# Altium PCB Light Panel - Copy.PcbDoc (part 1 of 2)
Units mm, origin at the board's own origin, x right, y up, seen from the top; angles counter-clockwise.
Board outline 300 x 185 mm, 2 copper layers (Top Layer, Bottom Layer), stack 1.671 mm thick; 278 components, 216 nets, 568 pads, 0 vias.
Unrouted connection lines stored in the file: 23.
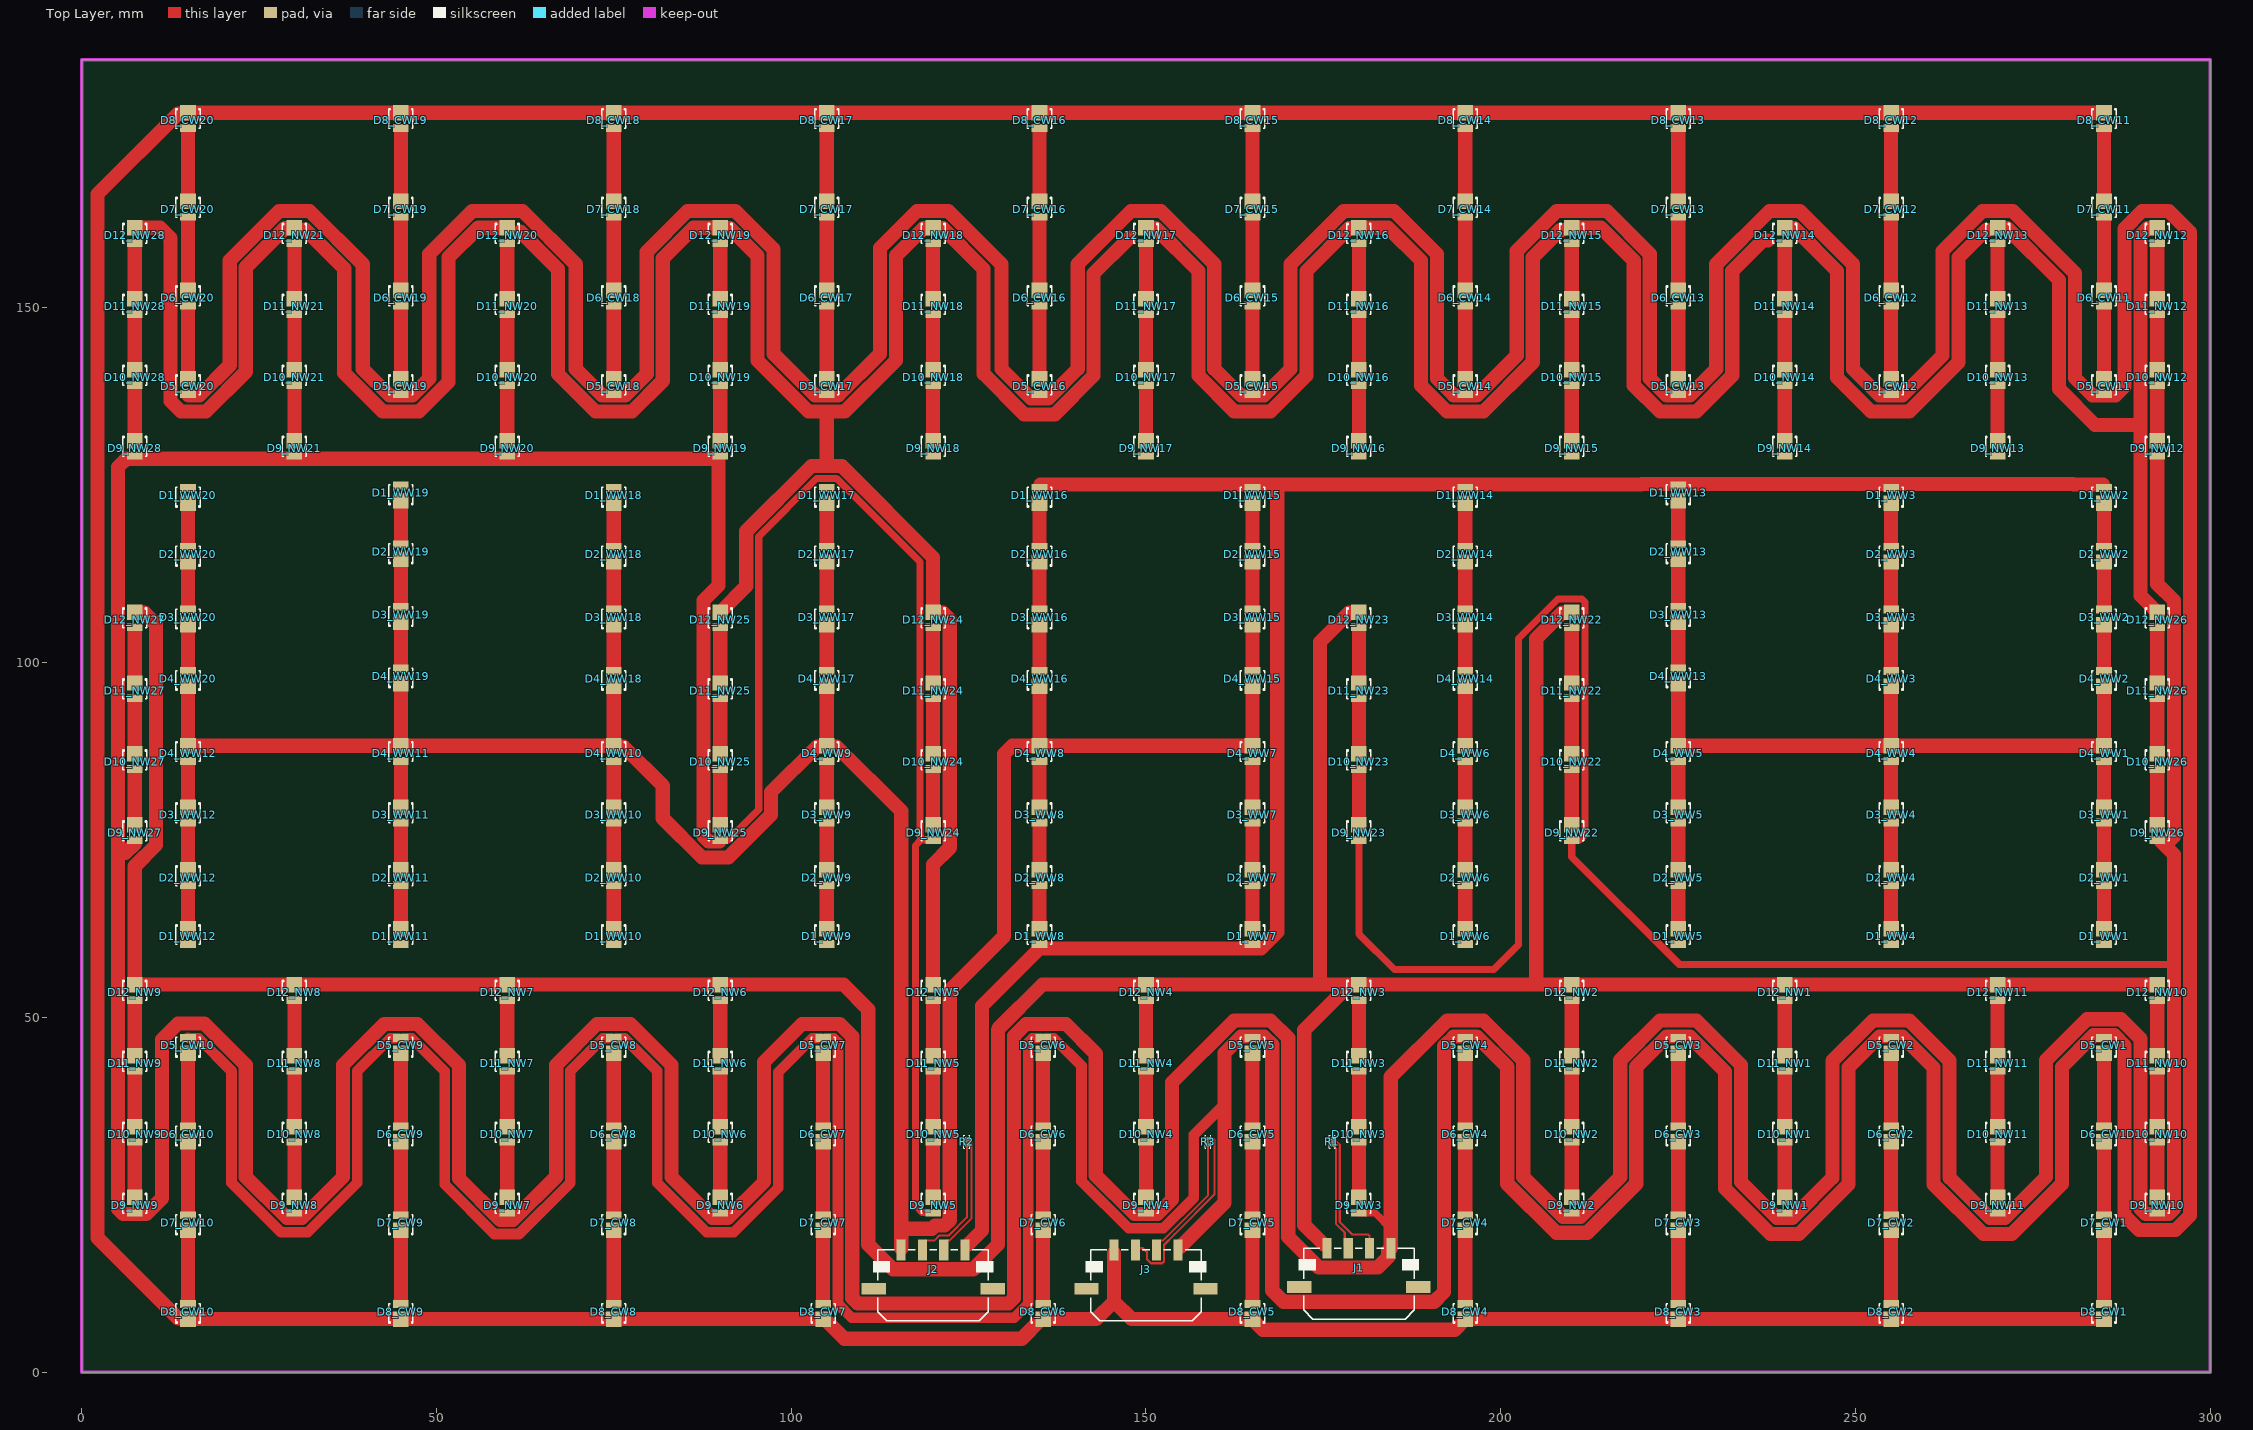
[diagram p0: Top Layer view]
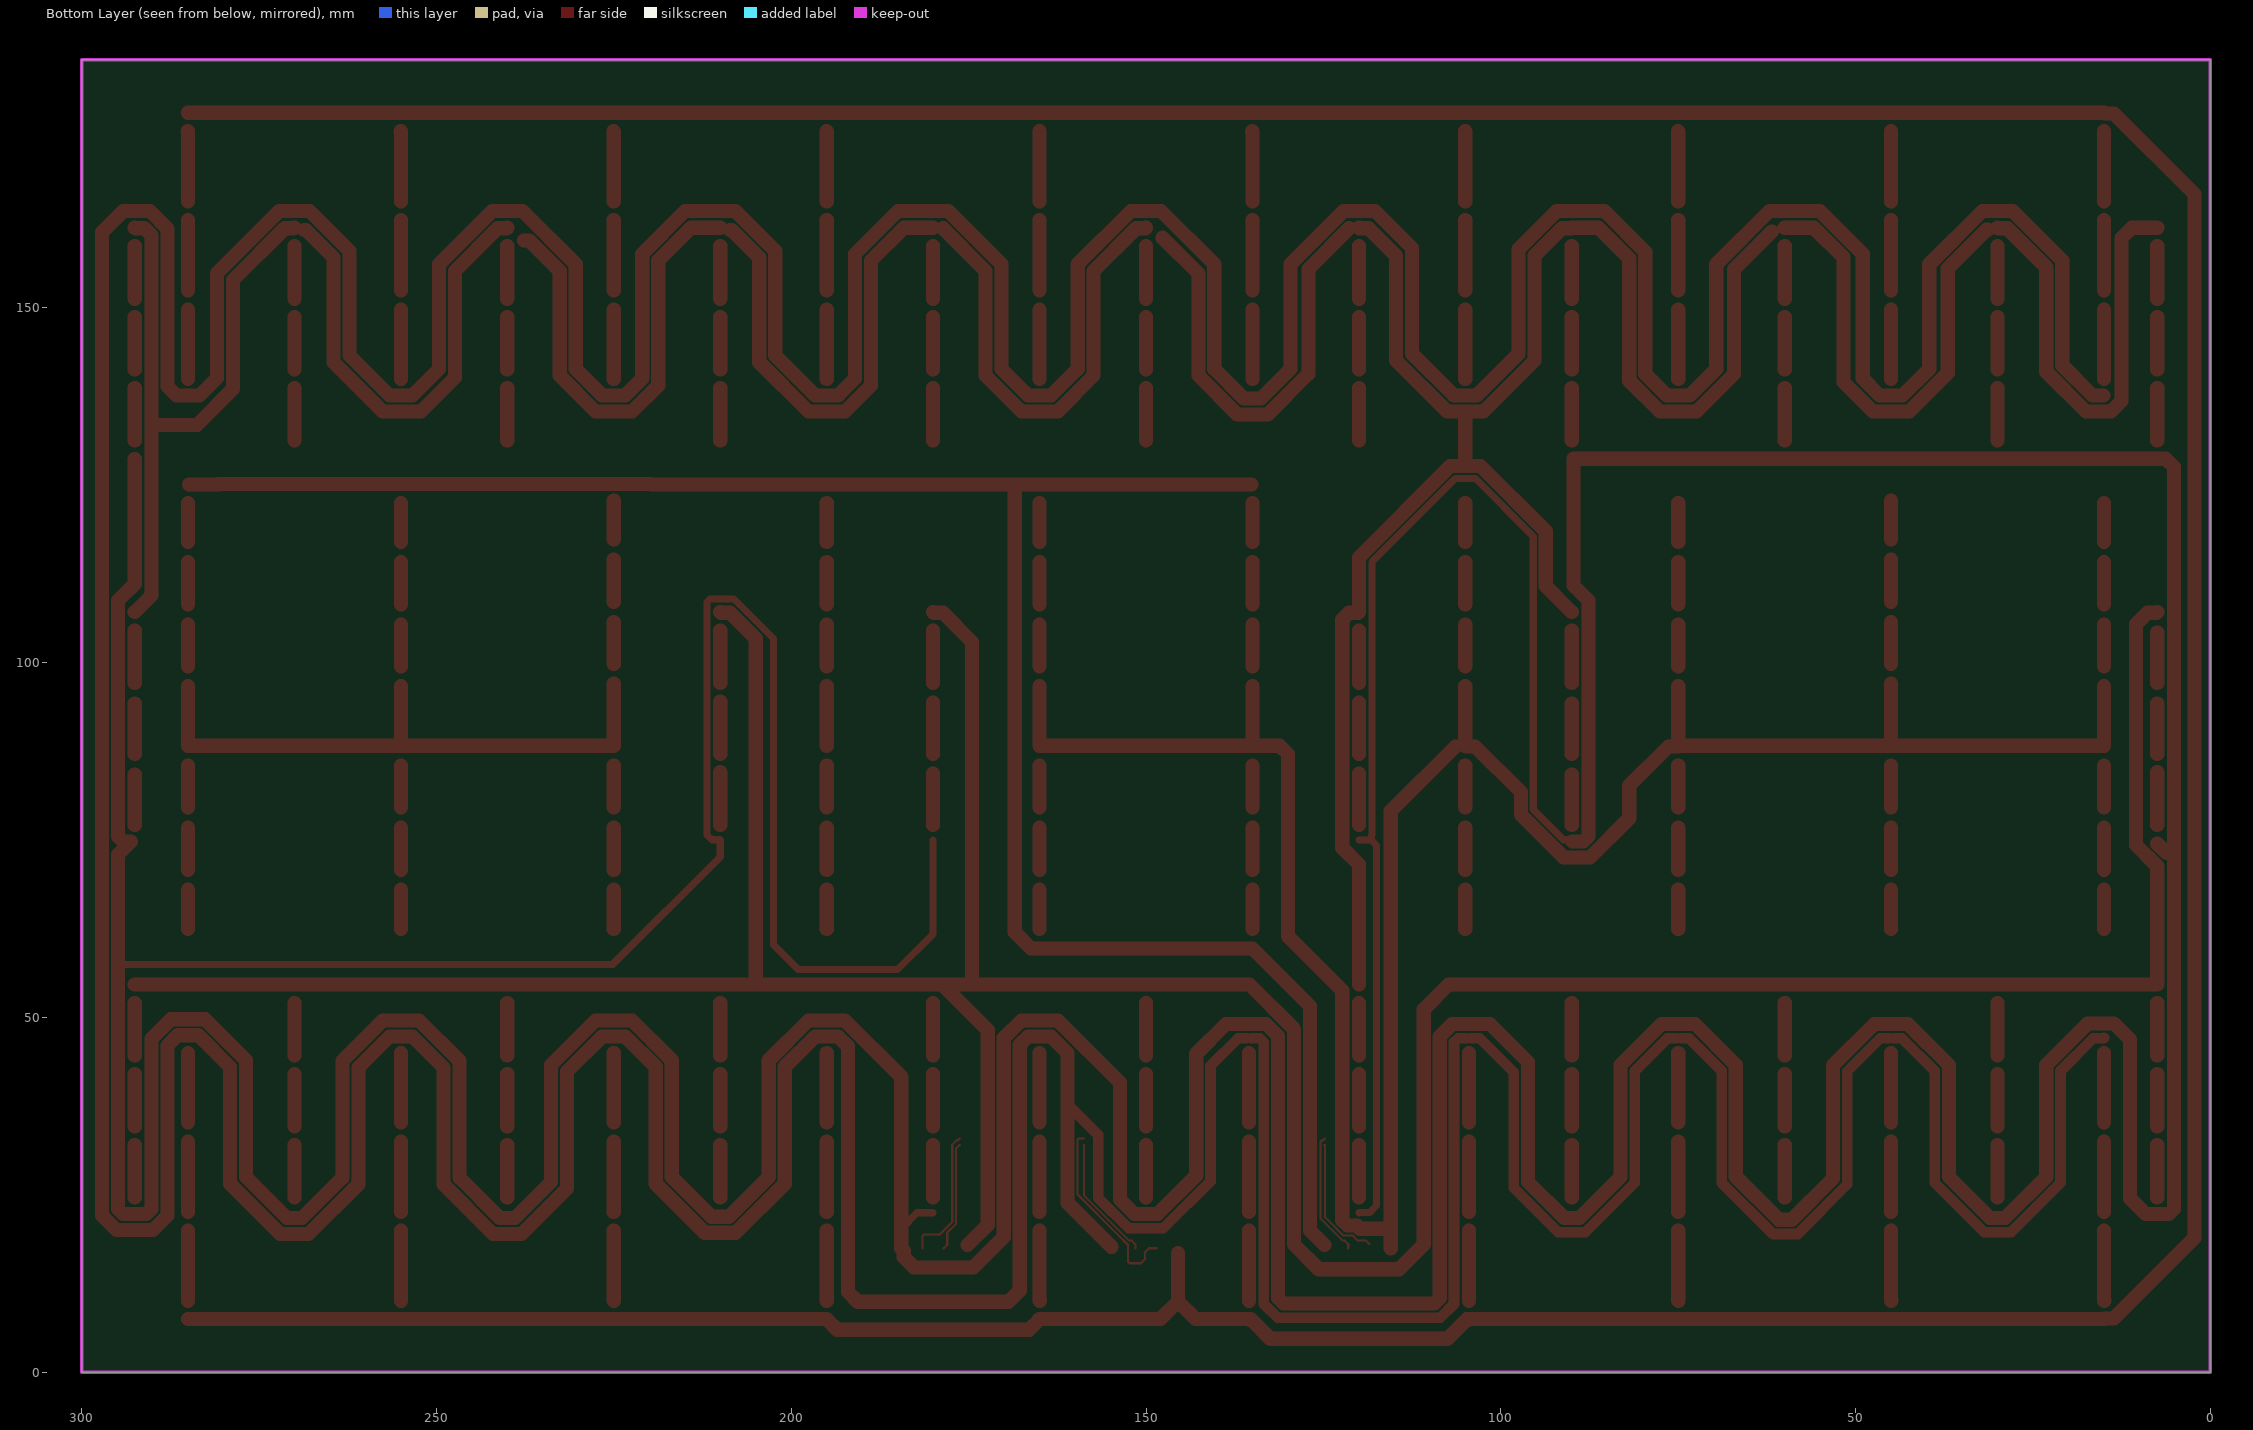
[diagram p1: Bottom Layer view, seen from below]
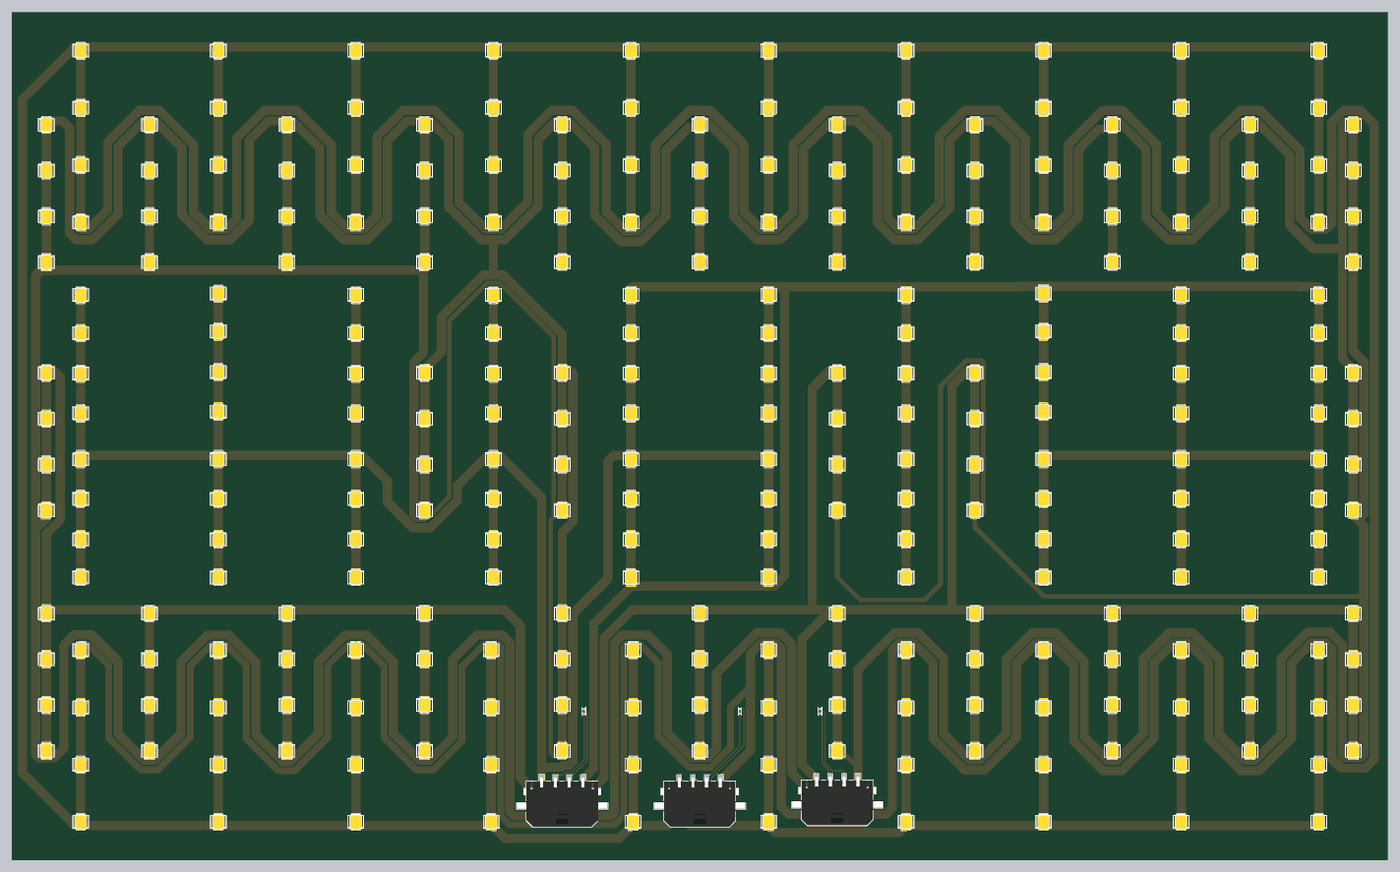
[diagram p3: 3D render of the assembled board from above, using the file's embedded part models]

## Layer stack, top to bottom
Top Solder: solder mask 0.0102, Solder Resist, Dk 3.5
Top Layer: signal copper 0.0356
Dielectric 1: dielectric 0.2, FR-4, Dk 4.8
Aluminium: core 1.4, Al, Dk 4.5
Bottom Layer: signal copper 0.0356
Bottom Solder: solder mask 0.0102, Solder Resist, Dk 3.5

## Board outline
0,0 300,0 300,185 0,185

## Design rules (kind name [scope] priority, off if disabled: settings)
Clearance [All] p1: gap=0.254 ignorepadtopadclearanceinfootprint=FALSE except(0: Arc-Hole Track-Hole SMDPad-Hole THPad-Hole Via-Hole Fill-Hole Poly-Hole Region-Hole Text-Hole)
PolygonConnect [All] p1: connectstyle=Direct reliefconductorwidth=0.254 reliefentries=4 polygonreliefangle="90 Angle" airgapwidth=0.254
RoomDefinition CW7 [InComponentClass('CW7')] p1: confinementstyle=ConfineIn formatcopy=TRUE lockcomponents=FALSE outline 102,50 102,5.805 107,5.805 107,50
RoomDefinition "Studio Light Panel" [InComponentClass('Studio Light Panel')] p2: confinementstyle=ConfineIn formatcopy=TRUE lockcomponents=FALSE outline 107.5,0 192.5,0 192.5,37.25 107.5,37.25
RoomDefinition NW1 [InComponentClass('NW1')] p3: confinementstyle=ConfineIn formatcopy=TRUE lockcomponents=FALSE outline 242.5,20.84 242.5,57.5 237.5,57.5 237.5,20.84
RoomDefinition NW2 [InComponentClass('NW2')] p4: confinementstyle=ConfineIn formatcopy=TRUE lockcomponents=FALSE outline 212.5,20.84 212.5,57.5 207.5,57.5 207.5,20.84
RoomDefinition NW3 [InComponentClass('NW3')] p5: confinementstyle=ConfineIn formatcopy=TRUE lockcomponents=FALSE outline 182.5,20.84 182.5,57.5 177.5,57.5 177.5,20.84
RoomDefinition NW4 [InComponentClass('NW4')] p6: confinementstyle=ConfineIn formatcopy=TRUE lockcomponents=FALSE outline 152.5,20.84 152.5,57.5 147.5,57.5 147.5,20.84
RoomDefinition NW5 [InComponentClass('NW5')] p7: confinementstyle=ConfineIn formatcopy=TRUE lockcomponents=FALSE outline 122.5,20.84 122.5,57.5 117.5,57.5 117.5,20.84
RoomDefinition NW6 [InComponentClass('NW6')] p8: confinementstyle=ConfineIn formatcopy=TRUE lockcomponents=FALSE outline 92.5,20.84 92.5,57.5 87.5,57.5 87.5,20.84
RoomDefinition NW7 [InComponentClass('NW7')] p9: confinementstyle=ConfineIn formatcopy=TRUE lockcomponents=FALSE outline 62.5,20.84 62.5,57.5 57.5,57.5 57.5,20.84
RoomDefinition NW8 [InComponentClass('NW8')] p10: confinementstyle=ConfineIn formatcopy=TRUE lockcomponents=FALSE outline 32.5,20.84 32.5,57.5 27.5,57.5 27.5,20.84
RoomDefinition NW9 [InComponentClass('NW9')] p11: confinementstyle=ConfineIn formatcopy=TRUE lockcomponents=FALSE outline 10,20.84 10,57.5 5,57.5 5,20.84
RoomDefinition NW10 [InComponentClass('NW10')] p12: confinementstyle=ConfineIn formatcopy=TRUE lockcomponents=FALSE outline 295,20.84 295,57.5 290,57.5 290,20.84
RoomDefinition NW12 [InComponentClass('NW12')] p13: confinementstyle=ConfineIn formatcopy=TRUE lockcomponents=FALSE outline 295,127.5 295,164.16 290,164.16 290,127.5
RoomDefinition NW13 [InComponentClass('NW13')] p14: confinementstyle=ConfineIn formatcopy=TRUE lockcomponents=FALSE outline 272.5,127.5 272.5,164.16 267.5,164.16 267.5,127.5
RoomDefinition NW14 [InComponentClass('NW14')] p15: confinementstyle=ConfineIn formatcopy=TRUE lockcomponents=FALSE outline 242.5,127.5 242.5,164.16 237.5,164.16 237.5,127.5
RoomDefinition NW15 [InComponentClass('NW15')] p16: confinementstyle=ConfineIn formatcopy=TRUE lockcomponents=FALSE outline 212.5,127.5 212.5,164.16 207.5,164.16 207.5,127.5
RoomDefinition NW16 [InComponentClass('NW16')] p17: confinementstyle=ConfineIn formatcopy=TRUE lockcomponents=FALSE outline 182.5,127.5 182.5,164.16 177.5,164.16 177.5,127.5
RoomDefinition NW17 [InComponentClass('NW17')] p18: confinementstyle=ConfineIn formatcopy=TRUE lockcomponents=FALSE outline 152.5,127.5 152.5,164.16 147.5,164.16 147.5,127.5
RoomDefinition NW18 [InComponentClass('NW18')] p19: confinementstyle=ConfineIn formatcopy=TRUE lockcomponents=FALSE outline 122.5,127.5 122.5,164.16 117.5,164.16 117.5,127.5
RoomDefinition NW19 [InComponentClass('NW19')] p20: confinementstyle=ConfineIn formatcopy=TRUE lockcomponents=FALSE outline 92.5,127.5 92.5,164.16 87.5,164.16 87.5,127.5
RoomDefinition NW20 [InComponentClass('NW20')] p21: confinementstyle=ConfineIn formatcopy=TRUE lockcomponents=FALSE outline 62.5,127.5 62.5,164.16 57.5,164.16 57.5,127.5
RoomDefinition NW21 [InComponentClass('NW21')] p22: confinementstyle=ConfineIn formatcopy=TRUE lockcomponents=FALSE outline 32.5,127.5 32.5,164.16 27.5,164.16 27.5,127.5
RoomDefinition NW22 [InComponentClass('NW22')] p23: confinementstyle=ConfineIn formatcopy=TRUE lockcomponents=FALSE outline 212.5,73.34 212.5,110 207.5,110 207.5,73.34
RoomDefinition NW23 [InComponentClass('NW23')] p24: confinementstyle=ConfineIn formatcopy=TRUE lockcomponents=FALSE outline 182.5,73.34 182.5,110 177.5,110 177.5,73.34
RoomDefinition NW24 [InComponentClass('NW24')] p25: confinementstyle=ConfineIn formatcopy=TRUE lockcomponents=FALSE outline 122.5,73.34 122.5,110 117.5,110 117.5,73.34
RoomDefinition NW25 [InComponentClass('NW25')] p26: confinementstyle=ConfineIn formatcopy=TRUE lockcomponents=FALSE outline 92.5,73.34 92.5,110 87.5,110 87.5,73.34
RoomDefinition NW26 [InComponentClass('NW26')] p27: confinementstyle=ConfineIn formatcopy=TRUE lockcomponents=FALSE outline 295,73.34 295,110 290,110 290,73.34
RoomDefinition NW27 [InComponentClass('NW27')] p28: confinementstyle=ConfineIn formatcopy=TRUE lockcomponents=FALSE outline 10,73.34 10,110 5,110 5,73.34
RoomDefinition NW28 [InComponentClass('NW28')] p29: confinementstyle=ConfineIn formatcopy=TRUE lockcomponents=FALSE outline 10,127.5 10,164.16 5,164.16 5,127.5
RoomDefinition CW1 [InComponentClass('CW1')] p30: confinementstyle=ConfineIn formatcopy=TRUE lockcomponents=FALSE outline 282.5,50 282.5,5.805 287.5,5.805 287.5,50
RoomDefinition CW19 [InComponentClass('CW19')] p31: confinementstyle=ConfineIn formatcopy=TRUE lockcomponents=FALSE outline 47.5,135 47.5,179.195 42.5,179.195 42.5,135
RoomDefinition CW18 [InComponentClass('CW18')] p32: confinementstyle=ConfineIn formatcopy=TRUE lockcomponents=FALSE outline 77.5,135 77.5,179.195 72.5,179.195 72.5,135
RoomDefinition CW17 [InComponentClass('CW17')] p33: confinementstyle=ConfineIn formatcopy=TRUE lockcomponents=FALSE outline 107.5,135 107.5,179.195 102.5,179.195 102.5,135
RoomDefinition CW16 [InComponentClass('CW16')] p34: confinementstyle=ConfineIn formatcopy=TRUE lockcomponents=FALSE outline 137.5,135 137.5,179.195 132.5,179.195 132.5,135
RoomDefinition CW15 [InComponentClass('CW15')] p35: confinementstyle=ConfineIn formatcopy=TRUE lockcomponents=FALSE outline 167.5,135 167.5,179.195 162.5,179.195 162.5,135
RoomDefinition CW14 [InComponentClass('CW14')] p36: confinementstyle=ConfineIn formatcopy=TRUE lockcomponents=FALSE outline 197.5,135 197.5,179.195 192.5,179.195 192.5,135
RoomDefinition CW13 [InComponentClass('CW13')] p37: confinementstyle=ConfineIn formatcopy=TRUE lockcomponents=FALSE outline 227.5,135 227.5,179.195 222.5,179.195 222.5,135
RoomDefinition CW12 [InComponentClass('CW12')] p38: confinementstyle=ConfineIn formatcopy=TRUE lockcomponents=FALSE outline 257.5,135 257.5,179.195 252.5,179.195 252.5,135
RoomDefinition CW11 [InComponentClass('CW11')] p39: confinementstyle=ConfineIn formatcopy=TRUE lockcomponents=FALSE outline 287.5,135 287.5,179.195 282.5,179.195 282.5,135
RoomDefinition CW2 [InComponentClass('CW2')] p40: confinementstyle=ConfineIn formatcopy=TRUE lockcomponents=FALSE outline 252.5,50 252.5,5.805 257.5,5.805 257.5,50
RoomDefinition CW3 [InComponentClass('CW3')] p41: confinementstyle=ConfineIn formatcopy=TRUE lockcomponents=FALSE outline 222.5,50 222.5,5.805 227.5,5.805 227.5,50
RoomDefinition CW4 [InComponentClass('CW4')] p42: confinementstyle=ConfineIn formatcopy=TRUE lockcomponents=FALSE outline 192.5,50 192.5,5.805 197.5,5.805 197.5,50
RoomDefinition CW5 [InComponentClass('CW5')] p43: confinementstyle=ConfineIn formatcopy=TRUE lockcomponents=FALSE outline 162.5,50 162.5,5.805 167.5,5.805 167.5,50
RoomDefinition CW6 [InComponentClass('CW6')] p44: confinementstyle=ConfineIn formatcopy=TRUE lockcomponents=FALSE outline 133,50 133,5.805 138,5.805 138,50
RoomDefinition CW8 [InComponentClass('CW8')] p45: confinementstyle=ConfineIn formatcopy=TRUE lockcomponents=FALSE outline 72.5,50 72.5,5.805 77.5,5.805 77.5,50
RoomDefinition CW9 [InComponentClass('CW9')] p46: confinementstyle=ConfineIn formatcopy=TRUE lockcomponents=FALSE outline 42.5,50 42.5,5.805 47.5,5.805 47.5,50
RoomDefinition CW20 [InComponentClass('CW20')] p47: confinementstyle=ConfineIn formatcopy=TRUE lockcomponents=FALSE outline 17.5,135 17.5,179.195 12.5,179.195 12.5,135
RoomDefinition CW10 [InComponentClass('CW10')] p48: confinementstyle=ConfineIn formatcopy=TRUE lockcomponents=FALSE outline 12.5,50 12.5,5.805 17.5,5.805 17.5,50
RoomDefinition WW1 [InComponentClass('WW1')] p49: confinementstyle=ConfineIn formatcopy=TRUE lockcomponents=FALSE outline 287.5,57.5 287.5,90 282.5,90 282.5,57.5
RoomDefinition WW20 [InComponentClass('WW20')] p50: confinementstyle=ConfineIn formatcopy=TRUE lockcomponents=FALSE outline 12.5,127.5 12.5,95 17.5,95 17.5,127.5
RoomDefinition WW19 [InComponentClass('WW19')] p51: confinementstyle=ConfineIn formatcopy=TRUE lockcomponents=FALSE outline 42.5,127.855 42.5,95.355 47.5,95.355 47.5,127.855
RoomDefinition WW18 [InComponentClass('WW18')] p52: confinementstyle=ConfineIn formatcopy=TRUE lockcomponents=FALSE outline 72.5,127.5 72.5,95 77.5,95 77.5,127.5
RoomDefinition WW17 [InComponentClass('WW17')] p53: confinementstyle=ConfineIn formatcopy=TRUE lockcomponents=FALSE outline 102.5,127.5 102.5,95 107.5,95 107.5,127.5
RoomDefinition WW16 [InComponentClass('WW16')] p54: confinementstyle=ConfineIn formatcopy=TRUE lockcomponents=FALSE outline 132.5,127.5 132.5,95 137.5,95 137.5,127.5
RoomDefinition WW15 [InComponentClass('WW15')] p55: confinementstyle=ConfineIn formatcopy=TRUE lockcomponents=FALSE outline 162.5,127.5 162.5,95 167.5,95 167.5,127.5
RoomDefinition WW14 [InComponentClass('WW14')] p56: confinementstyle=ConfineIn formatcopy=TRUE lockcomponents=FALSE outline 192.5,127.5 192.5,95 197.5,95 197.5,127.5
RoomDefinition WW13 [InComponentClass('WW13')] p57: confinementstyle=ConfineIn formatcopy=TRUE lockcomponents=FALSE outline 222.5,127.855 222.5,95.355 227.5,95.355 227.5,127.855
RoomDefinition WW12 [InComponentClass('WW12')] p58: confinementstyle=ConfineIn formatcopy=TRUE lockcomponents=FALSE outline 17.5,57.5 17.5,90 12.5,90 12.5,57.5
RoomDefinition WW11 [InComponentClass('WW11')] p59: confinementstyle=ConfineIn formatcopy=TRUE lockcomponents=FALSE outline 47.5,57.5 47.5,90 42.5,90 42.5,57.5
RoomDefinition WW10 [InComponentClass('WW10')] p60: confinementstyle=ConfineIn formatcopy=TRUE lockcomponents=FALSE outline 77.5,57.5 77.5,90 72.5,90 72.5,57.5
RoomDefinition WW9 [InComponentClass('WW9')] p61: confinementstyle=ConfineIn formatcopy=TRUE lockcomponents=FALSE outline 107.5,57.5 107.5,90 102.5,90 102.5,57.5
RoomDefinition WW8 [InComponentClass('WW8')] p62: confinementstyle=ConfineIn formatcopy=TRUE lockcomponents=FALSE outline 137.5,57.5 137.5,90 132.5,90 132.5,57.5
RoomDefinition WW7 [InComponentClass('WW7')] p63: confinementstyle=ConfineIn formatcopy=TRUE lockcomponents=FALSE outline 167.5,57.5 167.5,90 162.5,90 162.5,57.5
RoomDefinition WW6 [InComponentClass('WW6')] p64: confinementstyle=ConfineIn formatcopy=TRUE lockcomponents=FALSE outline 197.5,57.5 197.5,90 192.5,90 192.5,57.5
RoomDefinition WW5 [InComponentClass('WW5')] p65: confinementstyle=ConfineIn formatcopy=TRUE lockcomponents=FALSE outline 227.5,57.5 227.5,90 222.5,90 222.5,57.5
RoomDefinition WW4 [InComponentClass('WW4')] p66: confinementstyle=ConfineIn formatcopy=TRUE lockcomponents=FALSE outline 257.5,57.5 257.5,90 252.5,90 252.5,57.5
RoomDefinition WW3 [InComponentClass('WW3')] p67: confinementstyle=ConfineIn formatcopy=TRUE lockcomponents=FALSE outline 252.5,127.5 252.5,95 257.5,95 257.5,127.5
RoomDefinition WW2 [InComponentClass('WW2')] p68: confinementstyle=ConfineIn formatcopy=TRUE lockcomponents=FALSE outline 282.5,127.5 282.5,95 287.5,95 287.5,127.5
RoomDefinition NW11 [InComponentClass('NW11')] p69: confinementstyle=ConfineIn formatcopy=TRUE lockcomponents=FALSE outline 272.5,20.84 272.5,57.5 267.5,57.5 267.5,20.84
RoutingVias [All] p1: holewidth=0.711 width=1.27 viastyle="Through Hole" minholewidth=0.711 minwidth=1.27 maxholewidth=0.711 maxwidth=1.27
SolderMaskExpansion [All] p1: expansion=0.102 istentingtop=FALSE
Width [All] p1: maxlimit=6 minlimit=0.3 preferedwidth=2.5
30 further rules are at their usual default settings.

## Classes and differential pairs
channel class "Warm White LEDs": WW1 WW2 WW3 WW4 WW5 WW6 WW7 WW8 WW9 WW10 WW11 WW12 WW13 WW14 WW15 WW16 WW17 WW18 WW19 WW20
channel class "Neutral White LEDs": NW1 NW2 NW3 NW4 NW5 NW6 NW7 NW8 NW9 NW10 NW11 NW12 NW13 NW14 NW15 NW16 NW17 NW18 NW19 NW20 NW21 NW22 NW23 NW24 NW25 NW26 NW27 NW28
channel class "Cool White LEDs": CW1 CW2 CW3 CW4 CW5 CW6 CW7 CW8 CW9 CW10 CW11 CW12 CW13 CW14 CW15 CW16 CW17 CW18 CW19 CW20
component class WW20: D1_WW20 D2_WW20 D3_WW20 D4_WW20
component class WW19: D1_WW19 D2_WW19 D3_WW19 D4_WW19
component class WW18: D1_WW18 D2_WW18 D3_WW18 D4_WW18
component class WW17: D1_WW17 D2_WW17 D3_WW17 D4_WW17
component class WW16: D1_WW16 D2_WW16 D3_WW16 D4_WW16
component class WW15: D1_WW15 D2_WW15 D3_WW15 D4_WW15
component class WW14: D1_WW14 D2_WW14 D3_WW14 D4_WW14
component class WW13: D1_WW13 D2_WW13 D3_WW13 D4_WW13
component class WW12: D1_WW12 D2_WW12 D3_WW12 D4_WW12
component class WW11: D1_WW11 D2_WW11 D3_WW11 D4_WW11
component class WW10: D1_WW10 D2_WW10 D3_WW10 D4_WW10
component class WW9: D1_WW9 D2_WW9 D3_WW9 D4_WW9
component class WW8: D1_WW8 D2_WW8 D3_WW8 D4_WW8
component class WW7: D1_WW7 D2_WW7 D3_WW7 D4_WW7
component class WW6: D1_WW6 D2_WW6 D3_WW6 D4_WW6
component class WW5: D1_WW5 D2_WW5 D3_WW5 D4_WW5
component class WW4: D1_WW4 D2_WW4 D3_WW4 D4_WW4
component class WW3: D1_WW3 D2_WW3 D3_WW3 D4_WW3
component class WW2: D1_WW2 D2_WW2 D3_WW2 D4_WW2
component class WW1: D1_WW1 D2_WW1 D3_WW1 D4_WW1
component class "Studio Light Panel": J1 J2 J3 R1 R2 R3
component class NW28: D9_NW28 D10_NW28 D11_NW28 D12_NW28
component class NW27: D9_NW27 D10_NW27 D11_NW27 D12_NW27
component class NW26: D9_NW26 D10_NW26 D11_NW26 D12_NW26
component class NW25: D9_NW25 D10_NW25 D11_NW25 D12_NW25
component class NW24: D9_NW24 D10_NW24 D11_NW24 D12_NW24
component class NW23: D9_NW23 D10_NW23 D11_NW23 D12_NW23
component class NW22: D9_NW22 D10_NW22 D11_NW22 D12_NW22
component class NW21: D9_NW21 D10_NW21 D11_NW21 D12_NW21
component class NW20: D9_NW20 D10_NW20 D11_NW20 D12_NW20
component class NW19: D9_NW19 D10_NW19 D11_NW19 D12_NW19
component class NW18: D9_NW18 D10_NW18 D11_NW18 D12_NW18
component class NW17: D9_NW17 D10_NW17 D11_NW17 D12_NW17
component class NW16: D9_NW16 D10_NW16 D11_NW16 D12_NW16
component class NW15: D9_NW15 D10_NW15 D11_NW15 D12_NW15
component class NW14: D9_NW14 D10_NW14 D11_NW14 D12_NW14
component class NW13: D9_NW13 D10_NW13 D11_NW13 D12_NW13
component class NW12: D9_NW12 D10_NW12 D11_NW12 D12_NW12
component class NW11: D9_NW11 D10_NW11 D11_NW11 D12_NW11
component class NW10: D9_NW10 D10_NW10 D11_NW10 D12_NW10
component class NW9: D9_NW9 D10_NW9 D11_NW9 D12_NW9
component class NW8: D9_NW8 D10_NW8 D11_NW8 D12_NW8
component class NW7: D9_NW7 D10_NW7 D11_NW7 D12_NW7
component class NW6: D9_NW6 D10_NW6 D11_NW6 D12_NW6
component class NW5: D9_NW5 D10_NW5 D11_NW5 D12_NW5
component class NW4: D9_NW4 D10_NW4 D11_NW4 D12_NW4
component class NW3: D9_NW3 D10_NW3 D11_NW3 D12_NW3
component class NW2: D9_NW2 D10_NW2 D11_NW2 D12_NW2
component class NW1: D9_NW1 D10_NW1 D11_NW1 D12_NW1
component class CW20: D5_CW20 D6_CW20 D7_CW20 D8_CW20
component class CW19: D5_CW19 D6_CW19 D7_CW19 D8_CW19
component class CW18: D5_CW18 D6_CW18 D7_CW18 D8_CW18
component class CW17: D5_CW17 D6_CW17 D7_CW17 D8_CW17
component class CW16: D5_CW16 D6_CW16 D7_CW16 D8_CW16
component class CW15: D5_CW15 D6_CW15 D7_CW15 D8_CW15
component class CW14: D5_CW14 D6_CW14 D7_CW14 D8_CW14
component class CW13: D5_CW13 D6_CW13 D7_CW13 D8_CW13
component class CW12: D5_CW12 D6_CW12 D7_CW12 D8_CW12
component class CW11: D5_CW11 D6_CW11 D7_CW11 D8_CW11
component class CW10: D5_CW10 D6_CW10 D7_CW10 D8_CW10
component class CW9: D5_CW9 D6_CW9 D7_CW9 D8_CW9
component class CW8: D5_CW8 D6_CW8 D7_CW8 D8_CW8
component class CW7: D5_CW7 D6_CW7 D7_CW7 D8_CW7
component class CW6: D5_CW6 D6_CW6 D7_CW6 D8_CW6
component class CW5: D5_CW5 D6_CW5 D7_CW5 D8_CW5
component class CW4: D5_CW4 D6_CW4 D7_CW4 D8_CW4
component class CW3: D5_CW3 D6_CW3 D7_CW3 D8_CW3
component class CW2: D5_CW2 D6_CW2 D7_CW2 D8_CW2
component class CW1: D5_CW1 D6_CW1 D7_CW1 D8_CW1

## Components (designator, comment, footprint, x,y, rotation, side; value= is the part's Value field where it differs from the comment)
D1_WW1 "SPMWH1228MD7WAVUVK" "SAMSUNG LM281BPLUS" 285,61.695 r90 top (schematic designator D1)
D1_WW2 "SPMWH1228MD7WAVUVK" "SAMSUNG LM281BPLUS" 285,123.305 r270 top (schematic designator D1)
D1_WW3 "SPMWH1228MD7WAVUVK" "SAMSUNG LM281BPLUS" 255,123.305 r270 top (schematic designator D1)
D1_WW4 "SPMWH1228MD7WAVUVK" "SAMSUNG LM281BPLUS" 255,61.695 r90 top (schematic designator D1)
D1_WW5 "SPMWH1228MD7WAVUVK" "SAMSUNG LM281BPLUS" 225,61.695 r90 top (schematic designator D1)
D1_WW6 "SPMWH1228MD7WAVUVK" "SAMSUNG LM281BPLUS" 195,61.695 r90 top (schematic designator D1)
D1_WW7 "SPMWH1228MD7WAVUVK" "SAMSUNG LM281BPLUS" 165,61.695 r90 top (schematic designator D1)
D1_WW8 "SPMWH1228MD7WAVUVK" "SAMSUNG LM281BPLUS" 135,61.695 r90 top (schematic designator D1)
D1_WW9 "SPMWH1228MD7WAVUVK" "SAMSUNG LM281BPLUS" 105,61.695 r90 top (schematic designator D1)
D1_WW10 "SPMWH1228MD7WAVUVK" "SAMSUNG LM281BPLUS" 75,61.695 r90 top (schematic designator D1)
D1_WW11 "SPMWH1228MD7WAVUVK" "SAMSUNG LM281BPLUS" 45,61.695 r90 top (schematic designator D1)
D1_WW12 "SPMWH1228MD7WAVUVK" "SAMSUNG LM281BPLUS" 15,61.695 r90 top (schematic designator D1)
D1_WW13 "SPMWH1228MD7WAVUVK" "SAMSUNG LM281BPLUS" 225,123.66 r270 top (schematic designator D1)
D1_WW14 "SPMWH1228MD7WAVUVK" "SAMSUNG LM281BPLUS" 195,123.305 r270 top (schematic designator D1)
D1_WW15 "SPMWH1228MD7WAVUVK" "SAMSUNG LM281BPLUS" 165,123.305 r270 top (schematic designator D1)
D1_WW16 "SPMWH1228MD7WAVUVK" "SAMSUNG LM281BPLUS" 135,123.305 r270 top (schematic designator D1)
D1_WW17 "SPMWH1228MD7WAVUVK" "SAMSUNG LM281BPLUS" 105,123.305 r270 top (schematic designator D1)
D1_WW18 "SPMWH1228MD7WAVUVK" "SAMSUNG LM281BPLUS" 75,123.305 r270 top (schematic designator D1)
D1_WW19 "SPMWH1228MD7WAVUVK" "SAMSUNG LM281BPLUS" 45,123.66 r270 top (schematic designator D1)
D1_WW20 "SPMWH1228MD7WAVUVK" "SAMSUNG LM281BPLUS" 15,123.305 r270 top (schematic designator D1)
D2_WW1 "SPMWH1228MD7WAVUVK" "SAMSUNG LM281BPLUS" 285,70 r90 top (schematic designator D2)
D2_WW2 "SPMWH1228MD7WAVUVK" "SAMSUNG LM281BPLUS" 285,115 r270 top (schematic designator D2)
D2_WW3 "SPMWH1228MD7WAVUVK" "SAMSUNG LM281BPLUS" 255,115 r270 top (schematic designator D2)
D2_WW4 "SPMWH1228MD7WAVUVK" "SAMSUNG LM281BPLUS" 255,70 r90 top (schematic designator D2)
D2_WW5 "SPMWH1228MD7WAVUVK" "SAMSUNG LM281BPLUS" 225,70 r90 top (schematic designator D2)
D2_WW6 "SPMWH1228MD7WAVUVK" "SAMSUNG LM281BPLUS" 195,70 r90 top (schematic designator D2)
D2_WW7 "SPMWH1228MD7WAVUVK" "SAMSUNG LM281BPLUS" 165,70 r90 top (schematic designator D2)
D2_WW8 "SPMWH1228MD7WAVUVK" "SAMSUNG LM281BPLUS" 135,70 r90 top (schematic designator D2)
D2_WW9 "SPMWH1228MD7WAVUVK" "SAMSUNG LM281BPLUS" 105,70 r90 top (schematic designator D2)
D2_WW10 "SPMWH1228MD7WAVUVK" "SAMSUNG LM281BPLUS" 75,70 r90 top (schematic designator D2)
D2_WW11 "SPMWH1228MD7WAVUVK" "SAMSUNG LM281BPLUS" 45,70 r90 top (schematic designator D2)
D2_WW12 "SPMWH1228MD7WAVUVK" "SAMSUNG LM281BPLUS" 15,70 r90 top (schematic designator D2)
D2_WW13 "SPMWH1228MD7WAVUVK" "SAMSUNG LM281BPLUS" 225,115.355 r270 top (schematic designator D2)
D2_WW14 "SPMWH1228MD7WAVUVK" "SAMSUNG LM281BPLUS" 195,115 r270 top (schematic designator D2)
D2_WW15 "SPMWH1228MD7WAVUVK" "SAMSUNG LM281BPLUS" 165,115 r270 top (schematic designator D2)
D2_WW16 "SPMWH1228MD7WAVUVK" "SAMSUNG LM281BPLUS" 135,115 r270 top (schematic designator D2)
D2_WW17 "SPMWH1228MD7WAVUVK" "SAMSUNG LM281BPLUS" 105,115 r270 top (schematic designator D2)
D2_WW18 "SPMWH1228MD7WAVUVK" "SAMSUNG LM281BPLUS" 75,115 r270 top (schematic designator D2)
D2_WW19 "SPMWH1228MD7WAVUVK" "SAMSUNG LM281BPLUS" 45,115.355 r270 top (schematic designator D2)
D2_WW20 "SPMWH1228MD7WAVUVK" "SAMSUNG LM281BPLUS" 15,115 r270 top (schematic designator D2)
D3_WW1 "SPMWH1228MD7WAVUVK" "SAMSUNG LM281BPLUS" 285,78.84 r90 top (schematic designator D3)
D3_WW2 "SPMWH1228MD7WAVUVK" "SAMSUNG LM281BPLUS" 285,106.16 r270 top (schematic designator D3)
D3_WW3 "SPMWH1228MD7WAVUVK" "SAMSUNG LM281BPLUS" 255,106.16 r270 top (schematic designator D3)
D3_WW4 "SPMWH1228MD7WAVUVK" "SAMSUNG LM281BPLUS" 255,78.84 r90 top (schematic designator D3)
D3_WW5 "SPMWH1228MD7WAVUVK" "SAMSUNG LM281BPLUS" 225,78.84 r90 top (schematic designator D3)
D3_WW6 "SPMWH1228MD7WAVUVK" "SAMSUNG LM281BPLUS" 195,78.84 r90 top (schematic designator D3)
D3_WW7 "SPMWH1228MD7WAVUVK" "SAMSUNG LM281BPLUS" 165,78.84 r90 top (schematic designator D3)
D3_WW8 "SPMWH1228MD7WAVUVK" "SAMSUNG LM281BPLUS" 135,78.84 r90 top (schematic designator D3)
D3_WW9 "SPMWH1228MD7WAVUVK" "SAMSUNG LM281BPLUS" 105,78.84 r90 top (schematic designator D3)
D3_WW10 "SPMWH1228MD7WAVUVK" "SAMSUNG LM281BPLUS" 75,78.84 r90 top (schematic designator D3)
D3_WW11 "SPMWH1228MD7WAVUVK" "SAMSUNG LM281BPLUS" 45,78.84 r90 top (schematic designator D3)
D3_WW12 "SPMWH1228MD7WAVUVK" "SAMSUNG LM281BPLUS" 15,78.84 r90 top (schematic designator D3)
D3_WW13 "SPMWH1228MD7WAVUVK" "SAMSUNG LM281BPLUS" 225,106.515 r270 top (schematic designator D3)
D3_WW14 "SPMWH1228MD7WAVUVK" "SAMSUNG LM281BPLUS" 195,106.16 r270 top (schematic designator D3)
D3_WW15 "SPMWH1228MD7WAVUVK" "SAMSUNG LM281BPLUS" 165,106.16 r270 top (schematic designator D3)
D3_WW16 "SPMWH1228MD7WAVUVK" "SAMSUNG LM281BPLUS" 135,106.16 r270 top (schematic designator D3)
D3_WW17 "SPMWH1228MD7WAVUVK" "SAMSUNG LM281BPLUS" 105,106.16 r270 top (schematic designator D3)
D3_WW18 "SPMWH1228MD7WAVUVK" "SAMSUNG LM281BPLUS" 75,106.16 r270 top (schematic designator D3)
D3_WW19 "SPMWH1228MD7WAVUVK" "SAMSUNG LM281BPLUS" 45,106.515 r270 top (schematic designator D3)
D3_WW20 "SPMWH1228MD7WAVUVK" "SAMSUNG LM281BPLUS" 15,106.16 r270 top (schematic designator D3)
D4_WW1 "SPMWH1228MD7WAVUVK" "SAMSUNG LM281BPLUS" 285,87.5 r90 top (schematic designator D4)
D4_WW2 "SPMWH1228MD7WAVUVK" "SAMSUNG LM281BPLUS" 285,97.5 r270 top (schematic designator D4)
D4_WW3 "SPMWH1228MD7WAVUVK" "SAMSUNG LM281BPLUS" 255,97.5 r270 top (schematic designator D4)
D4_WW4 "SPMWH1228MD7WAVUVK" "SAMSUNG LM281BPLUS" 255,87.5 r90 top (schematic designator D4)
D4_WW5 "SPMWH1228MD7WAVUVK" "SAMSUNG LM281BPLUS" 225,87.5 r90 top (schematic designator D4)
D4_WW6 "SPMWH1228MD7WAVUVK" "SAMSUNG LM281BPLUS" 195,87.5 r90 top (schematic designator D4)
D4_WW7 "SPMWH1228MD7WAVUVK" "SAMSUNG LM281BPLUS" 165,87.5 r90 top (schematic designator D4)
D4_WW8 "SPMWH1228MD7WAVUVK" "SAMSUNG LM281BPLUS" 135,87.5 r90 top (schematic designator D4)
D4_WW9 "SPMWH1228MD7WAVUVK" "SAMSUNG LM281BPLUS" 105,87.5 r90 top (schematic designator D4)
D4_WW10 "SPMWH1228MD7WAVUVK" "SAMSUNG LM281BPLUS" 75,87.5 r90 top (schematic designator D4)
D4_WW11 "SPMWH1228MD7WAVUVK" "SAMSUNG LM281BPLUS" 45,87.5 r90 top (schematic designator D4)
D4_WW12 "SPMWH1228MD7WAVUVK" "SAMSUNG LM281BPLUS" 15,87.5 r90 top (schematic designator D4)
D4_WW13 "SPMWH1228MD7WAVUVK" "SAMSUNG LM281BPLUS" 225,97.855 r270 top (schematic designator D4)
D4_WW14 "SPMWH1228MD7WAVUVK" "SAMSUNG LM281BPLUS" 195,97.5 r270 top (schematic designator D4)
D4_WW15 "SPMWH1228MD7WAVUVK" "SAMSUNG LM281BPLUS" 165,97.5 r270 top (schematic designator D4)
D4_WW16 "SPMWH1228MD7WAVUVK" "SAMSUNG LM281BPLUS" 135,97.5 r270 top (schematic designator D4)
D4_WW17 "SPMWH1228MD7WAVUVK" "SAMSUNG LM281BPLUS" 105,97.5 r270 top (schematic designator D4)
D4_WW18 "SPMWH1228MD7WAVUVK" "SAMSUNG LM281BPLUS" 75,97.5 r270 top (schematic designator D4)
D4_WW19 "SPMWH1228MD7WAVUVK" "SAMSUNG LM281BPLUS" 45,97.855 r270 top (schematic designator D4)
D4_WW20 "SPMWH1228MD7WAVUVK" "SAMSUNG LM281BPLUS" 15,97.5 r270 top (schematic designator D4)
D5_CW1 "SPMWH1228MD7WAPMVL" "SAMSUNG LM281BPLUS" 285,45.805 r270 top (schematic designator D5)
D5_CW2 "SPMWH1228MD7WAPMVL" "SAMSUNG LM281BPLUS" 255,45.805 r270 top (schematic designator D5)
D5_CW3 "SPMWH1228MD7WAPMVL" "SAMSUNG LM281BPLUS" 225,45.805 r270 top (schematic designator D5)
D5_CW4 "SPMWH1228MD7WAPMVL" "SAMSUNG LM281BPLUS" 195,45.805 r270 top (schematic designator D5)
D5_CW5 "SPMWH1228MD7WAPMVL" "SAMSUNG LM281BPLUS" 165,45.805 r270 top (schematic designator D5)
D5_CW6 "SPMWH1228MD7WAPMVL" "SAMSUNG LM281BPLUS" 135.5,45.805 r270 top (schematic designator D5)
D5_CW7 "SPMWH1228MD7WAPMVL" "SAMSUNG LM281BPLUS" 104.5,45.805 r270 top (schematic designator D5)
D5_CW8 "SPMWH1228MD7WAPMVL" "SAMSUNG LM281BPLUS" 75,45.805 r270 top (schematic designator D5)
D5_CW9 "SPMWH1228MD7WAPMVL" "SAMSUNG LM281BPLUS" 45,45.805 r270 top (schematic designator D5)
D5_CW10 "SPMWH1228MD7WAPMVL" "SAMSUNG LM281BPLUS" 15,45.805 r270 top (schematic designator D5)
D5_CW11 "SPMWH1228MD7WAPMVL" "SAMSUNG LM281BPLUS" 285,139.195 r90 top (schematic designator D5)
D5_CW12 "SPMWH1228MD7WAPMVL" "SAMSUNG LM281BPLUS" 255,139.195 r90 top (schematic designator D5)
D5_CW13 "SPMWH1228MD7WAPMVL" "SAMSUNG LM281BPLUS" 225,139.195 r90 top (schematic designator D5)
D5_CW14 "SPMWH1228MD7WAPMVL" "SAMSUNG LM281BPLUS" 195,139.195 r90 top (schematic designator D5)
D5_CW15 "SPMWH1228MD7WAPMVL" "SAMSUNG LM281BPLUS" 165,139.195 r90 top (schematic designator D5)
D5_CW16 "SPMWH1228MD7WAPMVL" "SAMSUNG LM281BPLUS" 135,139.195 r90 top (schematic designator D5)
D5_CW17 "SPMWH1228MD7WAPMVL" "SAMSUNG LM281BPLUS" 105,139.195 r90 top (schematic designator D5)
D5_CW18 "SPMWH1228MD7WAPMVL" "SAMSUNG LM281BPLUS" 75,139.195 r90 top (schematic designator D5)
D5_CW19 "SPMWH1228MD7WAPMVL" "SAMSUNG LM281BPLUS" 45,139.195 r90 top (schematic designator D5)
D5_CW20 "SPMWH1228MD7WAPMVL" "SAMSUNG LM281BPLUS" 15,139.195 r90 top (schematic designator D5)
D6_CW1 "SPMWH1228MD7WAPMVL" "SAMSUNG LM281BPLUS" 285,33.305 r270 top (schematic designator D6)
D6_CW2 "SPMWH1228MD7WAPMVL" "SAMSUNG LM281BPLUS" 255,33.305 r270 top (schematic designator D6)
D6_CW3 "SPMWH1228MD7WAPMVL" "SAMSUNG LM281BPLUS" 225,33.305 r270 top (schematic designator D6)
D6_CW4 "SPMWH1228MD7WAPMVL" "SAMSUNG LM281BPLUS" 195,33.305 r270 top (schematic designator D6)
D6_CW5 "SPMWH1228MD7WAPMVL" "SAMSUNG LM281BPLUS" 165,33.305 r270 top (schematic designator D6)
D6_CW6 "SPMWH1228MD7WAPMVL" "SAMSUNG LM281BPLUS" 135.5,33.305 r270 top (schematic designator D6)
D6_CW7 "SPMWH1228MD7WAPMVL" "SAMSUNG LM281BPLUS" 104.5,33.305 r270 top (schematic designator D6)
D6_CW8 "SPMWH1228MD7WAPMVL" "SAMSUNG LM281BPLUS" 75,33.305 r270 top (schematic designator D6)
D6_CW9 "SPMWH1228MD7WAPMVL" "SAMSUNG LM281BPLUS" 45,33.305 r270 top (schematic designator D6)
D6_CW10 "SPMWH1228MD7WAPMVL" "SAMSUNG LM281BPLUS" 15,33.305 r270 top (schematic designator D6)
D6_CW11 "SPMWH1228MD7WAPMVL" "SAMSUNG LM281BPLUS" 285,151.695 r90 top (schematic designator D6)
D6_CW12 "SPMWH1228MD7WAPMVL" "SAMSUNG LM281BPLUS" 255,151.695 r90 top (schematic designator D6)
D6_CW13 "SPMWH1228MD7WAPMVL" "SAMSUNG LM281BPLUS" 225,151.695 r90 top (schematic designator D6)
D6_CW14 "SPMWH1228MD7WAPMVL" "SAMSUNG LM281BPLUS" 195,151.695 r90 top (schematic designator D6)
D6_CW15 "SPMWH1228MD7WAPMVL" "SAMSUNG LM281BPLUS" 165,151.695 r90 top (schematic designator D6)
D6_CW16 "SPMWH1228MD7WAPMVL" "SAMSUNG LM281BPLUS" 135,151.695 r90 top (schematic designator D6)
D6_CW17 "SPMWH1228MD7WAPMVL" "SAMSUNG LM281BPLUS" 105,151.695 r90 top (schematic designator D6)
D6_CW18 "SPMWH1228MD7WAPMVL" "SAMSUNG LM281BPLUS" 75,151.695 r90 top (schematic designator D6)
D6_CW19 "SPMWH1228MD7WAPMVL" "SAMSUNG LM281BPLUS" 45,151.695 r90 top (schematic designator D6)
D6_CW20 "SPMWH1228MD7WAPMVL" "SAMSUNG LM281BPLUS" 15,151.695 r90 top (schematic designator D6)
D7_CW1 "SPMWH1228MD7WAPMVL" "SAMSUNG LM281BPLUS" 285,20.805 r270 top (schematic designator D7)
D7_CW2 "SPMWH1228MD7WAPMVL" "SAMSUNG LM281BPLUS" 255,20.805 r270 top (schematic designator D7)
D7_CW3 "SPMWH1228MD7WAPMVL" "SAMSUNG LM281BPLUS" 225,20.805 r270 top (schematic designator D7)
D7_CW4 "SPMWH1228MD7WAPMVL" "SAMSUNG LM281BPLUS" 195,20.805 r270 top (schematic designator D7)
D7_CW5 "SPMWH1228MD7WAPMVL" "SAMSUNG LM281BPLUS" 165,20.805 r270 top (schematic designator D7)
D7_CW6 "SPMWH1228MD7WAPMVL" "SAMSUNG LM281BPLUS" 135.5,20.805 r270 top (schematic designator D7)
D7_CW7 "SPMWH1228MD7WAPMVL" "SAMSUNG LM281BPLUS" 104.5,20.805 r270 top (schematic designator D7)
D7_CW8 "SPMWH1228MD7WAPMVL" "SAMSUNG LM281BPLUS" 75,20.805 r270 top (schematic designator D7)
D7_CW9 "SPMWH1228MD7WAPMVL" "SAMSUNG LM281BPLUS" 45,20.805 r270 top (schematic designator D7)
D7_CW10 "SPMWH1228MD7WAPMVL" "SAMSUNG LM281BPLUS" 15,20.805 r270 top (schematic designator D7)
D7_CW11 "SPMWH1228MD7WAPMVL" "SAMSUNG LM281BPLUS" 285,164.195 r90 top (schematic designator D7)
D7_CW12 "SPMWH1228MD7WAPMVL" "SAMSUNG LM281BPLUS" 255,164.195 r90 top (schematic designator D7)
D7_CW13 "SPMWH1228MD7WAPMVL" "SAMSUNG LM281BPLUS" 225,164.195 r90 top (schematic designator D7)
D7_CW14 "SPMWH1228MD7WAPMVL" "SAMSUNG LM281BPLUS" 195,164.195 r90 top (schematic designator D7)
D7_CW15 "SPMWH1228MD7WAPMVL" "SAMSUNG LM281BPLUS" 165,164.195 r90 top (schematic designator D7)
D7_CW16 "SPMWH1228MD7WAPMVL" "SAMSUNG LM281BPLUS" 135,164.195 r90 top (schematic designator D7)
D7_CW17 "SPMWH1228MD7WAPMVL" "SAMSUNG LM281BPLUS" 105,164.195 r90 top (schematic designator D7)
D7_CW18 "SPMWH1228MD7WAPMVL" "SAMSUNG LM281BPLUS" 75,164.195 r90 top (schematic designator D7)
D7_CW19 "SPMWH1228MD7WAPMVL" "SAMSUNG LM281BPLUS" 45,164.195 r90 top (schematic designator D7)
D7_CW20 "SPMWH1228MD7WAPMVL" "SAMSUNG LM281BPLUS" 15,164.195 r90 top (schematic designator D7)
D8_CW1 "SPMWH1228MD7WAPMVL" "SAMSUNG LM281BPLUS" 285,8.305 r270 top (schematic designator D8)
D8_CW2 "SPMWH1228MD7WAPMVL" "SAMSUNG LM281BPLUS" 255,8.305 r270 top (schematic designator D8)
D8_CW3 "SPMWH1228MD7WAPMVL" "SAMSUNG LM281BPLUS" 225,8.305 r270 top (schematic designator D8)
D8_CW4 "SPMWH1228MD7WAPMVL" "SAMSUNG LM281BPLUS" 195,8.305 r270 top (schematic designator D8)
D8_CW5 "SPMWH1228MD7WAPMVL" "SAMSUNG LM281BPLUS" 165,8.305 r270 top (schematic designator D8)
D8_CW6 "SPMWH1228MD7WAPMVL" "SAMSUNG LM281BPLUS" 135.5,8.305 r270 top (schematic designator D8)
D8_CW7 "SPMWH1228MD7WAPMVL" "SAMSUNG LM281BPLUS" 104.5,8.305 r270 top (schematic designator D8)
D8_CW8 "SPMWH1228MD7WAPMVL" "SAMSUNG LM281BPLUS" 75,8.305 r270 top (schematic designator D8)
D8_CW9 "SPMWH1228MD7WAPMVL" "SAMSUNG LM281BPLUS" 45,8.305 r270 top (schematic designator D8)
D8_CW10 "SPMWH1228MD7WAPMVL" "SAMSUNG LM281BPLUS" 15,8.305 r270 top (schematic designator D8)
D8_CW11 "SPMWH1228MD7WAPMVL" "SAMSUNG LM281BPLUS" 285,176.695 r90 top (schematic designator D8)
D8_CW12 "SPMWH1228MD7WAPMVL" "SAMSUNG LM281BPLUS" 255,176.695 r90 top (schematic designator D8)
D8_CW13 "SPMWH1228MD7WAPMVL" "SAMSUNG LM281BPLUS" 225,176.695 r90 top (schematic designator D8)
D8_CW14 "SPMWH1228MD7WAPMVL" "SAMSUNG LM281BPLUS" 195,176.695 r90 top (schematic designator D8)
D8_CW15 "SPMWH1228MD7WAPMVL" "SAMSUNG LM281BPLUS" 165,176.695 r90 top (schematic designator D8)
D8_CW16 "SPMWH1228MD7WAPMVL" "SAMSUNG LM281BPLUS" 135,176.695 r90 top (schematic designator D8)
D8_CW17 "SPMWH1228MD7WAPMVL" "SAMSUNG LM281BPLUS" 105,176.695 r90 top (schematic designator D8)
D8_CW18 "SPMWH1228MD7WAPMVL" "SAMSUNG LM281BPLUS" 75,176.695 r90 top (schematic designator D8)
D8_CW19 "SPMWH1228MD7WAPMVL" "SAMSUNG LM281BPLUS" 45,176.695 r90 top (schematic designator D8)
D8_CW20 "SPMWH1228MD7WAPMVL" "SAMSUNG LM281BPLUS" 15,176.695 r90 top (schematic designator D8)
D9_NW1 "SPMWH1228MD7WATMVL" "SAMSUNG LM281BPLUS" 240,23.84 r90 top (schematic designator D9)
D9_NW2 "SPMWH1228MD7WATMVL" "SAMSUNG LM281BPLUS" 210,23.84 r90 top (schematic designator D9)
D9_NW3 "SPMWH1228MD7WATMVL" "SAMSUNG LM281BPLUS" 180,23.84 r90 top (schematic designator D9)
D9_NW4 "SPMWH1228MD7WATMVL" "SAMSUNG LM281BPLUS" 150,23.84 r90 top (schematic designator D9)
D9_NW5 "SPMWH1228MD7WATMVL" "SAMSUNG LM281BPLUS" 120,23.84 r90 top (schematic designator D9)
D9_NW6 "SPMWH1228MD7WATMVL" "SAMSUNG LM281BPLUS" 90,23.84 r90 top (schematic designator D9)
D9_NW7 "SPMWH1228MD7WATMVL" "SAMSUNG LM281BPLUS" 60,23.84 r90 top (schematic designator D9)
D9_NW8 "SPMWH1228MD7WATMVL" "SAMSUNG LM281BPLUS" 30,23.84 r90 top (schematic designator D9)
D9_NW9 "SPMWH1228MD7WATMVL" "SAMSUNG LM281BPLUS" 7.5,23.84 r90 top (schematic designator D9)
D9_NW10 "SPMWH1228MD7WATMVL" "SAMSUNG LM281BPLUS" 292.5,23.84 r90 top (schematic designator D9)
D9_NW11 "SPMWH1228MD7WATMVL" "SAMSUNG LM281BPLUS" 270,23.84 r90 top (schematic designator D9)
D9_NW12 "SPMWH1228MD7WATMVL" "SAMSUNG LM281BPLUS" 292.5,130.5 r90 top (schematic designator D9)
D9_NW13 "SPMWH1228MD7WATMVL" "SAMSUNG LM281BPLUS" 270,130.5 r90 top (schematic designator D9)
D9_NW14 "SPMWH1228MD7WATMVL" "SAMSUNG LM281BPLUS" 240,130.5 r90 top (schematic designator D9)
D9_NW15 "SPMWH1228MD7WATMVL" "SAMSUNG LM281BPLUS" 210,130.5 r90 top (schematic designator D9)
D9_NW16 "SPMWH1228MD7WATMVL" "SAMSUNG LM281BPLUS" 180,130.5 r90 top (schematic designator D9)
D9_NW17 "SPMWH1228MD7WATMVL" "SAMSUNG LM281BPLUS" 150,130.5 r90 top (schematic designator D9)
D9_NW18 "SPMWH1228MD7WATMVL" "SAMSUNG LM281BPLUS" 120,130.5 r90 top (schematic designator D9)
D9_NW19 "SPMWH1228MD7WATMVL" "SAMSUNG LM281BPLUS" 90,130.5 r90 top (schematic designator D9)
D9_NW20 "SPMWH1228MD7WATMVL" "SAMSUNG LM281BPLUS" 60,130.5 r90 top (schematic designator D9)
D9_NW21 "SPMWH1228MD7WATMVL" "SAMSUNG LM281BPLUS" 30,130.5 r90 top (schematic designator D9)
D9_NW22 "SPMWH1228MD7WATMVL" "SAMSUNG LM281BPLUS" 210,76.34 r90 top (schematic designator D9)
D9_NW23 "SPMWH1228MD7WATMVL" "SAMSUNG LM281BPLUS" 180,76.34 r90 top (schematic designator D9)
D9_NW24 "SPMWH1228MD7WATMVL" "SAMSUNG LM281BPLUS" 120,76.34 r90 top (schematic designator D9)
D9_NW25 "SPMWH1228MD7WATMVL" "SAMSUNG LM281BPLUS" 90,76.34 r90 top (schematic designator D9)
D9_NW26 "SPMWH1228MD7WATMVL" "SAMSUNG LM281BPLUS" 292.5,76.34 r90 top (schematic designator D9)
D9_NW27 "SPMWH1228MD7WATMVL" "SAMSUNG LM281BPLUS" 7.5,76.34 r90 top (schematic designator D9)
D9_NW28 "SPMWH1228MD7WATMVL" "SAMSUNG LM281BPLUS" 7.5,130.5 r90 top (schematic designator D9)
D10_NW1 "SPMWH1228MD7WATMVL" "SAMSUNG LM281BPLUS" 240,33.84 r90 top (schematic designator D10)
D10_NW2 "SPMWH1228MD7WATMVL" "SAMSUNG LM281BPLUS" 210,33.84 r90 top (schematic designator D10)
D10_NW3 "SPMWH1228MD7WATMVL" "SAMSUNG LM281BPLUS" 180,33.84 r90 top (schematic designator D10)
D10_NW4 "SPMWH1228MD7WATMVL" "SAMSUNG LM281BPLUS" 150,33.84 r90 top (schematic designator D10)
D10_NW5 "SPMWH1228MD7WATMVL" "SAMSUNG LM281BPLUS" 120,33.84 r90 top (schematic designator D10)
D10_NW6 "SPMWH1228MD7WATMVL" "SAMSUNG LM281BPLUS" 90,33.84 r90 top (schematic designator D10)
D10_NW7 "SPMWH1228MD7WATMVL" "SAMSUNG LM281BPLUS" 60,33.84 r90 top (schematic designator D10)
D10_NW8 "SPMWH1228MD7WATMVL" "SAMSUNG LM281BPLUS" 30,33.84 r90 top (schematic designator D10)
D10_NW9 "SPMWH1228MD7WATMVL" "SAMSUNG LM281BPLUS" 7.5,33.84 r90 top (schematic designator D10)
D10_NW10 "SPMWH1228MD7WATMVL" "SAMSUNG LM281BPLUS" 292.5,33.84 r90 top (schematic designator D10)
D10_NW11 "SPMWH1228MD7WATMVL" "SAMSUNG LM281BPLUS" 270,33.84 r90 top (schematic designator D10)
D10_NW12 "SPMWH1228MD7WATMVL" "SAMSUNG LM281BPLUS" 292.5,140.5 r90 top (schematic designator D10)
D10_NW13 "SPMWH1228MD7WATMVL" "SAMSUNG LM281BPLUS" 270,140.5 r90 top (schematic designator D10)
D10_NW14 "SPMWH1228MD7WATMVL" "SAMSUNG LM281BPLUS" 240,140.5 r90 top (schematic designator D10)
D10_NW15 "SPMWH1228MD7WATMVL" "SAMSUNG LM281BPLUS" 210,140.5 r90 top (schematic designator D10)
D10_NW16 "SPMWH1228MD7WATMVL" "SAMSUNG LM281BPLUS" 180,140.5 r90 top (schematic designator D10)
D10_NW17 "SPMWH1228MD7WATMVL" "SAMSUNG LM281BPLUS" 150,140.5 r90 top (schematic designator D10)
D10_NW18 "SPMWH1228MD7WATMVL" "SAMSUNG LM281BPLUS" 120,140.5 r90 top (schematic designator D10)
D10_NW19 "SPMWH1228MD7WATMVL" "SAMSUNG LM281BPLUS" 90,140.5 r90 top (schematic designator D10)
D10_NW20 "SPMWH1228MD7WATMVL" "SAMSUNG LM281BPLUS" 60,140.5 r90 top (schematic designator D10)
D10_NW21 "SPMWH1228MD7WATMVL" "SAMSUNG LM281BPLUS" 30,140.5 r90 top (schematic designator D10)
D10_NW22 "SPMWH1228MD7WATMVL" "SAMSUNG LM281BPLUS" 210,86.34 r90 top (schematic designator D10)
D10_NW23 "SPMWH1228MD7WATMVL" "SAMSUNG LM281BPLUS" 180,86.34 r90 top (schematic designator D10)
D10_NW24 "SPMWH1228MD7WATMVL" "SAMSUNG LM281BPLUS" 120,86.34 r90 top (schematic designator D10)
D10_NW25 "SPMWH1228MD7WATMVL" "SAMSUNG LM281BPLUS" 90,86.34 r90 top (schematic designator D10)
D10_NW26 "SPMWH1228MD7WATMVL" "SAMSUNG LM281BPLUS" 292.5,86.34 r90 top (schematic designator D10)
D10_NW27 "SPMWH1228MD7WATMVL" "SAMSUNG LM281BPLUS" 7.5,86.34 r90 top (schematic designator D10)
D10_NW28 "SPMWH1228MD7WATMVL" "SAMSUNG LM281BPLUS" 7.5,140.5 r90 top (schematic designator D10)
D11_NW1 "SPMWH1228MD7WATMVL" "SAMSUNG LM281BPLUS" 240,43.84 r90 top (schematic designator D11)
D11_NW2 "SPMWH1228MD7WATMVL" "SAMSUNG LM281BPLUS" 210,43.84 r90 top (schematic designator D11)
D11_NW3 "SPMWH1228MD7WATMVL" "SAMSUNG LM281BPLUS" 180,43.84 r90 top (schematic designator D11)
D11_NW4 "SPMWH1228MD7WATMVL" "SAMSUNG LM281BPLUS" 150,43.84 r90 top (schematic designator D11)
D11_NW5 "SPMWH1228MD7WATMVL" "SAMSUNG LM281BPLUS" 120,43.84 r90 top (schematic designator D11)
D11_NW6 "SPMWH1228MD7WATMVL" "SAMSUNG LM281BPLUS" 90,43.84 r90 top (schematic designator D11)
D11_NW7 "SPMWH1228MD7WATMVL" "SAMSUNG LM281BPLUS" 60,43.84 r90 top (schematic designator D11)
D11_NW8 "SPMWH1228MD7WATMVL" "SAMSUNG LM281BPLUS" 30,43.84 r90 top (schematic designator D11)
D11_NW9 "SPMWH1228MD7WATMVL" "SAMSUNG LM281BPLUS" 7.5,43.84 r90 top (schematic designator D11)
D11_NW10 "SPMWH1228MD7WATMVL" "SAMSUNG LM281BPLUS" 292.5,43.84 r90 top (schematic designator D11)
D11_NW11 "SPMWH1228MD7WATMVL" "SAMSUNG LM281BPLUS" 270,43.84 r90 top (schematic designator D11)
D11_NW12 "SPMWH1228MD7WATMVL" "SAMSUNG LM281BPLUS" 292.5,150.5 r90 top (schematic designator D11)
D11_NW13 "SPMWH1228MD7WATMVL" "SAMSUNG LM281BPLUS" 270,150.5 r90 top (schematic designator D11)
D11_NW14 "SPMWH1228MD7WATMVL" "SAMSUNG LM281BPLUS" 240,150.5 r90 top (schematic designator D11)
D11_NW15 "SPMWH1228MD7WATMVL" "SAMSUNG LM281BPLUS" 210,150.5 r90 top (schematic designator D11)
D11_NW16 "SPMWH1228MD7WATMVL" "SAMSUNG LM281BPLUS" 180,150.5 r90 top (schematic designator D11)
D11_NW17 "SPMWH1228MD7WATMVL" "SAMSUNG LM281BPLUS" 150,150.5 r90 top (schematic designator D11)
D11_NW18 "SPMWH1228MD7WATMVL" "SAMSUNG LM281BPLUS" 120,150.5 r90 top (schematic designator D11)
D11_NW19 "SPMWH1228MD7WATMVL" "SAMSUNG LM281BPLUS" 90,150.5 r90 top (schematic designator D11)
D11_NW20 "SPMWH1228MD7WATMVL" "SAMSUNG LM281BPLUS" 60,150.5 r90 top (schematic designator D11)
D11_NW21 "SPMWH1228MD7WATMVL" "SAMSUNG LM281BPLUS" 30,150.5 r90 top (schematic designator D11)
D11_NW22 "SPMWH1228MD7WATMVL" "SAMSUNG LM281BPLUS" 210,96.34 r90 top (schematic designator D11)
D11_NW23 "SPMWH1228MD7WATMVL" "SAMSUNG LM281BPLUS" 180,96.34 r90 top (schematic designator D11)
D11_NW24 "SPMWH1228MD7WATMVL" "SAMSUNG LM281BPLUS" 120,96.34 r90 top (schematic designator D11)
D11_NW25 "SPMWH1228MD7WATMVL" "SAMSUNG LM281BPLUS" 90,96.34 r90 top (schematic designator D11)
D11_NW26 "SPMWH1228MD7WATMVL" "SAMSUNG LM281BPLUS" 292.5,96.34 r90 top (schematic designator D11)
D11_NW27 "SPMWH1228MD7WATMVL" "SAMSUNG LM281BPLUS" 7.5,96.34 r90 top (schematic designator D11)
D11_NW28 "SPMWH1228MD7WATMVL" "SAMSUNG LM281BPLUS" 7.5,150.5 r90 top (schematic designator D11)
D12_NW1 "SPMWH1228MD7WATMVL" "SAMSUNG LM281BPLUS" 240,53.84 r90 top (schematic designator D12)
D12_NW2 "SPMWH1228MD7WATMVL" "SAMSUNG LM281BPLUS" 210,53.84 r90 top (schematic designator D12)
D12_NW3 "SPMWH1228MD7WATMVL" "SAMSUNG LM281BPLUS" 180,53.84 r90 top (schematic designator D12)
D12_NW4 "SPMWH1228MD7WATMVL" "SAMSUNG LM281BPLUS" 150,53.84 r90 top (schematic designator D12)
D12_NW5 "SPMWH1228MD7WATMVL" "SAMSUNG LM281BPLUS" 120,53.84 r90 top (schematic designator D12)
D12_NW6 "SPMWH1228MD7WATMVL" "SAMSUNG LM281BPLUS" 90,53.84 r90 top (schematic designator D12)
D12_NW7 "SPMWH1228MD7WATMVL" "SAMSUNG LM281BPLUS" 60,53.84 r90 top (schematic designator D12)
D12_NW8 "SPMWH1228MD7WATMVL" "SAMSUNG LM281BPLUS" 30,53.84 r90 top (schematic designator D12)
D12_NW9 "SPMWH1228MD7WATMVL" "SAMSUNG LM281BPLUS" 7.5,53.84 r90 top (schematic designator D12)
D12_NW10 "SPMWH1228MD7WATMVL" "SAMSUNG LM281BPLUS" 292.5,53.84 r90 top (schematic designator D12)
D12_NW11 "SPMWH1228MD7WATMVL" "SAMSUNG LM281BPLUS" 270,53.84 r90 top (schematic designator D12)
D12_NW12 "SPMWH1228MD7WATMVL" "SAMSUNG LM281BPLUS" 292.5,160.5 r90 top (schematic designator D12)
D12_NW13 "SPMWH1228MD7WATMVL" "SAMSUNG LM281BPLUS" 270,160.5 r90 top (schematic designator D12)
D12_NW14 "SPMWH1228MD7WATMVL" "SAMSUNG LM281BPLUS" 240,160.5 r90 top (schematic designator D12)
D12_NW15 "SPMWH1228MD7WATMVL" "SAMSUNG LM281BPLUS" 210,160.5 r90 top (schematic designator D12)
D12_NW16 "SPMWH1228MD7WATMVL" "SAMSUNG LM281BPLUS" 180,160.5 r90 top (schematic designator D12)
D12_NW17 "SPMWH1228MD7WATMVL" "SAMSUNG LM281BPLUS" 150,160.5 r90 top (schematic designator D12)
D12_NW18 "SPMWH1228MD7WATMVL" "SAMSUNG LM281BPLUS" 120,160.5 r90 top (schematic designator D12)
D12_NW19 "SPMWH1228MD7WATMVL" "SAMSUNG LM281BPLUS" 90,160.5 r90 top (schematic designator D12)
D12_NW20 "SPMWH1228MD7WATMVL" "SAMSUNG LM281BPLUS" 60,160.5 r90 top (schematic designator D12)
D12_NW21 "SPMWH1228MD7WATMVL" "SAMSUNG LM281BPLUS" 30,160.5 r90 top (schematic designator D12)
D12_NW22 "SPMWH1228MD7WATMVL" "SAMSUNG LM281BPLUS" 210,106.34 r90 top (schematic designator D12)
D12_NW23 "SPMWH1228MD7WATMVL" "SAMSUNG LM281BPLUS" 180,106.34 r90 top (schematic designator D12)
D12_NW24 "SPMWH1228MD7WATMVL" "SAMSUNG LM281BPLUS" 120,106.34 r90 top (schematic designator D12)
D12_NW25 "SPMWH1228MD7WATMVL" "SAMSUNG LM281BPLUS" 90,106.34 r90 top (schematic designator D12)
D12_NW26 "SPMWH1228MD7WATMVL" "SAMSUNG LM281BPLUS" 292.5,106.34 r90 top (schematic designator D12)
D12_NW27 "SPMWH1228MD7WATMVL" "SAMSUNG LM281BPLUS" 7.5,106.34 r90 top (schematic designator D12)
D12_NW28 "SPMWH1228MD7WATMVL" "SAMSUNG LM281BPLUS" 7.5,160.5 r90 top (schematic designator D12)
J1 "0436500412" "MOLEX 436500412" 180,12.5 r0 top
J2 "0436500412" "MOLEX 436500412" 120,12.25 r0 top
J3 "0436500412" "MOLEX 436500412" 150,12.25 r0 top
R1 "47k" "NTC 0402_1005" 176.25,32.5 r90 top
R2 "47k" "NTC 0402_1005" 124.75,32.5 r90 top
R3 "47k" "NTC 0402_1005" 158.75,32.5 r270 top

## Footprints (in the part's own frame and the unit in brackets; to place one, negate y for a bottom-side part, rotate by r counter-clockwise, add the part's x,y. Pads: shape width x height; smd on the part's side, far side on the other; paste and mask are expansions set on the pad)
"MOLEX 436500412" [mm]
  rect 1.27x2.92 smd: 1(4.5,5) 2(1.5,5) 3(-1.5,5) 4(-4.5,5)
  rect 3.43x1.65 smd: M(-8.385,-0.47) M(8.385,-0.47)
  silkscreen extent -8.5,-5 8.5,5, body extent -9.82,-4.95 9.82,5.79, height 5.68
"NTC 0402_1005" [mm] "Chip Thermistor, 2-Leads, Body 1.00x0.50mm, IPC Medium Density"
  rect 0.5x0.55 smd: 1(-0.45,0) 2(0.45,0)
  silkscreen extent -0.9,-0.4 0.9,0.4, body extent -0.5,-0.26 0.5,0.26, height 0.52
"SAMSUNG LM281BPLUS" [mm]
  rect 1.11x2.2 smd: A(-1.34,0)
  rect 2.18x2.2 smd: C(0.805,0)
  silkscreen extent -1.4,-1.7 1.4,1.7, body extent -1.75,-1.4 1.75,1.4, height 0.7